# Altium PCB SBM_BMS.PcbDoc (part 2 of 4)
Units mil, origin at the board's own origin, x right, y up, seen from the top; angles counter-clockwise.
Board outline 7537.59 x 2875 mil, 2 copper layers (Top Layer, Bottom Layer), stack 64.961 mil thick; 180 components, 137 nets, 631 pads, 494 vias.
Unrouted connection lines stored in the file: 10.
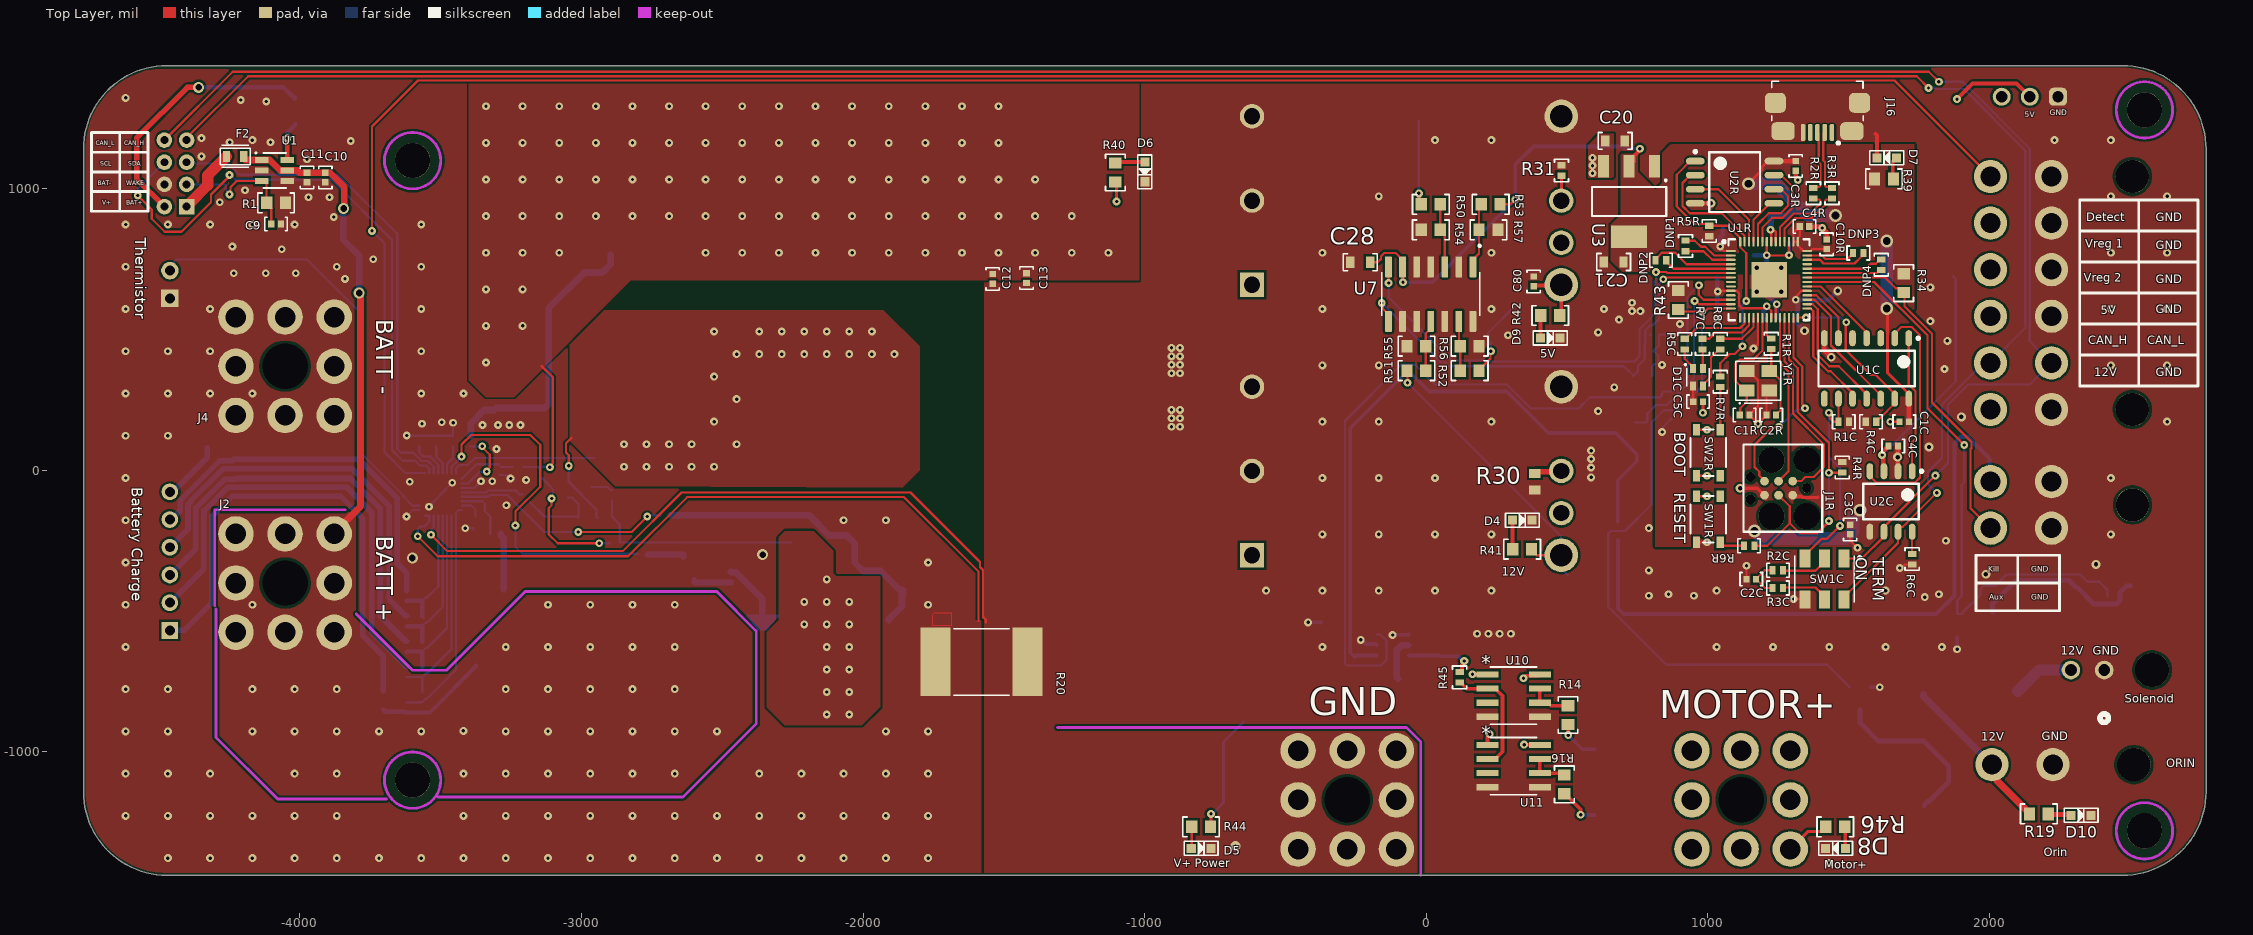
[diagram p0: Top Layer view]

## Part data (continued)
U1: library part MAX4520EUT+T, "Analog Switch SPST Normally Open", On resistance=160Ohm, Package="SOT-23-6 Analog Devices", Supplier Part Number 1=MAX4520EUT+TCT-ND, Voltage=9-36V, Circuit=SPST, ComponentLink1Description=Datasheet, ComponentLink1URL=https://www.analog.com/media/en/technical-documentation/data-sheets/max4510-max4520.pdf, Created By="Flip B", MF="Analog Devices", Supplier 1=Digi-Key
U1C: "CANbus Controller CAN 2.0 SPI Interface 14-SOIC", Made By="Robert Pafford", Max FD Rate="8 Mbps"
U1R: "Raspberry Pi RP2040", Crystal Frequency="12 MHz", Input Voltage=3.3V, Available Busses="SPI, I2C, PWM, USB", ComponentLink1Description=DigiKey, ComponentLink2Description=Datasheet, ComponentLink2URL=https://datasheets.raspberrypi.org/rp2040/rp2040-datasheet.pdf, Made By="Robert Pafford", Number of GPIOs=29
U2: library part BQ40Z80RSMT, "Multifuntion Li-ion/ Lipo Battery Pack Managment IC", Manufacturer="Texas Instruments", Quiescent Current=50mA, Supplier Part Number 1=296-BQ40Z80RSMTCT-ND, Supply Voltage="2.2V - 32V", ComponentLink1Description=Datasheet, ComponentLink1URL=https://www.ti.com/lit/ds/symlink/bq40z80.pdf?HQS=dis-dk-null-digikeymode-dsf-pf-null-wwe&ts=1672534896638&ref_url=https%253A%252F%252Fwww.ti.com%252Fgeneral%252Fdocs%252Fsuppproductinfo.tsp%253FdistId%253D10%2526gotoUrl%253Dhttps%253A%252F%252Fwww.ti.com%252Flit%252Fgpn%252Fbq40z80, Created By="Flip B", No. Of Cells=2S-6S, PartNumber=BQ40Z80RSMT, Supplier 1=Digi-Key
U2C: library part TJA1442AT, "CAN Interface IC High-Speed CAN Transceiver with Standby Mode", Supplier Part Number 1=771-TJA1442AT/0Z, Made By="Robert Pafford", Max Data Rate=5Mbps, Supplier 1=Mouser
U2R: "IC FLASH 128MBIT SPI/QUAD 8SOIC", Supplier Part Number 1=W25Q128JVSIQ-ND, Made By="Robert Pafford", Size=128M, Supplier 1=Digi-Key
U3: "800-mA 15-V linear voltage regulator 4-SOT-223 -40 to 125", Package="SOT-223-4 Texas Instruments", Arrow_Electronics-Purchase-URL=https://snapeda.com/shop?store=Arrow+Electronics&id=410186, Availability=Good, DigiKey-Purchase-URL=https://snapeda.com/shop?store=DigiKey&id=410186, MF="Texas Instruments", Mouser-Purchase-URL=https://snapeda.com/shop?store=Mouser&id=410186, MP=LM1117IMPX-3.3/NOPB, Price=None, SnapEDA_Link=https://www.snapeda.com/parts/LM1117IMPX-3.3/NOPB/Texas%20Instruments/view-part/410186/?ref=snap, Texas_Instruments-Purchase-URL=https://snapeda.com/shop?store=Texas+Instruments&id=410186
U4: library part SHT41-AD1B-R2, "Digital Relative Humidity Temperature Sensor, Â±1.8 / max 2.5 %RH, Â±0.2 Â°C, Ultra-Low-Power", Package=None, Supplier Part Number 1=1649-SHT41-AD1B-R2CT-ND, Availability="In Stock", Check_prices=https://www.snapeda.com/parts/SHT41-AD1B-R2/Sensirion/view-part/?ref=eda, MF=Sensirion, MP=SHT41-AD1B-R2, Price=None, Purchase-URL=https://pricing.snapeda.com/search/part/SHT41-AD1B-R2/?ref=eda, SnapEDA_Link=https://www.snapeda.com/parts/SHT41-AD1B-R2/Sensirion/view-part/?ref=snap, Supplier 1=Digi-Key
U5: "Diode Array 1 Pair Common Cathode 45 V Surface Mount TO-263-3, D²Pak (2 Leads + Tab), TO-263AB", Mfr_Name=Vishay, ComponentLink1Description="Supplier Link", ComponentLink1URL=https://www.digikey.com/en/products/detail/smc-diode-solutions/MBRB2545CT/6022901, Copyright="Copyright (C) 2023 Ultra Librarian. All rights reserved.", Manufacturer_Part_Number=MBRB2545CT, RefDes=RefDes, Type=DEV
U7: "16 Bit Analog to Digital Converter 4 Input 1 Sigma-Delta 14-SOIC", Package="SOIC-14 Microchip", Supplier Part Number 1=MCP3428-E/SL-ND, Availability=Unavailable, MF=Microchip, MP=MCP3428-E/SL, Price=None, SnapEDA_Link=https://www.snapeda.com/parts/MCP3428-E/SL/Microchip/view-part/13249/?ref=snap, Supplier 1=Digikey
U10 U11: "High-Side or Low-Side Gate Driver IC Non-Inverting 8-SOIC", Mfr_Name=Microchip, Supplier Part Number 1=TC4432EOA713CT-ND, Copyright="Copyright (C) 2024 Ultra Librarian. All rights reserved.", Manufacturer_Part_Number=TC4432EOA713, RefDes=RefDes, Supplier 1=Digikey, Type=DEV
U13: "IC SWITCH SPST-NOX1 25OHM 6TSOP", Mfr_Name=Vishay, Supplier Part Number 1=781-DG448DV-E3, Copyright="Copyright (C) 2024 Ultra Librarian. All rights reserved.", Manufacturer_Part_Number=DG448DV-T1-E3, RefDes=RefDes, Supplier 1=Mouser, Type=DEV
Y1R: library part CRYSTAL_12MHz_SMD_SMALL, "12 MHz ±20ppm Crystal 18pF 100 Ohms 4-SMD, No Lead (3.2x2.5mm)", Frequency="12 MHz", Load Capacitance=18pF, Supplier Part Number 1=2151-RH100-12.000-18-2030-EXT-TRCT-ND, ESR="100 Ohms", Made By="Robert Pafford", Supplier 1=Digi-Key

## Free pads (board coordinates)
  round 125 hole 125 unplated: 10(-3600,-1100) 10(-3600,1100) 10(2550,-1280) 10(2550,1280)

## Via types
v1: diameter 28, hole 12, Top Layer to Bottom Layer, tented both sides, 377 vias
v2: diameter 27.56, hole 11.81, Top Layer to Bottom Layer, tented both sides, 89 vias
v3: diameter 31.5, hole 15.75, Top Layer to Bottom Layer, tented both sides, 14 vias
v4: diameter 45.28, hole 27.56, Top Layer to Bottom Layer, tented both sides, 6 vias
v5: diameter 39.37, hole 23.62, Top Layer to Bottom Layer, tented both sides, 5 vias
v6: diameter 36, hole 12, Top Layer to Bottom Layer, tented both sides, 1 vias
v7: diameter 28, hole 12, Top Layer to Bottom Layer, 1 vias
v8: diameter 30, hole 12, Top Layer to Bottom Layer, tented both sides, 1 vias

## Nets (pads, with @x,y where several pads share a name; then routed paths per layer and width w, separated by ;. In a path a pad name is that pad's centre, name@x,y a point inside that pad or via, vN(x,y) a via of type N, cw(c..) or ccw(c..) an arc to the next point about the centre after c; other vN are vias at no path point)
1v1_RP2040: C11R.1 C12R.1 C13R.1 U1R.23 U1R.45 U1R.50 | length 566.9
  Top Layer w7.87: U1R.50@1208.94,812.3 v2(1208.94,763.58) v2(1287.68,763.58) U1R.45@1287.68,812.3 ; U1R.23@1240.43,541.63 1240.43,577.15 1248.31,585.03 v2@1248.31,590.35
  Bottom Layer w15.75: C13R.1@1163.07,763.58 v2(1208.94,763.58) 1208.94,625.68 v2(1244.27,590.35) 1244.27,548.53 1248.31,544.49 1248.31,543.7 1255.39,536.61 C12R.1@1256.18,536.61 ; v2(1287.68,763.58) C11R.1@1287.68,809.45
3V3_MEAS: R53.2 R57.1 U7.1 | length 234.5
  Top Layer w7.87: U7.1@165.35,722.64 165.35,748.23 186.97,769.85 R57.1@186.97,854.33 186.97,937.01 R53.2@194.85,944.88
3V3_RP2CAN: C1C.1 C3C.1 C3R.1 C4R.1 C5C.1 C5R.1 C6R.1 C7R.1 C8R.1 C9R.1 C10R.1 C21.1 C27.1 C28.1 D1C.4 J1R.2 R1C.1 R4C.1 R4R.1 R5R.1 R32.1 R33.1 R34.1 R35.1 R39.1 R43.1 R53.1 U1C.14 U1R.1 U1R.10 U1R.22 U1R.33 U1R.42 U1R.43 U1R.44 U1R.48 U1R.49 U2C.5 U2R.8 U3.2 U3.4 U4.3 U7.6 | length 5135.7
  Top Layer w7.87: C28.1@-200,739 -173.19,739 -161.4,750.78 -161.4,760.07 -149.62,771.85 -108.27,771.85 -84.65,748.23 U7.6@-84.65,722.64 -83.82,721.82 -83.82,668.82 v1(-83,668) ; R53.1@261.85,944.88 298.88,944.88 v1(316,962) ; U3.2@720,1080 U3.2@735.75,1095.75 ; v2@1035.71,637.6 U1R.10@1081.48,637.6 1101.29,637.6 1110.51,628.37 1110.51,612.13 1110.51,586.42 1120.99,575.94 1197.07,575.94 1203.61,582.48 v2(1208.94,582.48) 1224.69,566.73 U1R.22@1224.69,541.63 ; v2(1043.58,795.08) 1043.58,792.19 1056.44,779.33 U1R.1@1081.48,779.33 ; U1R.49@1224.69,812.3 1224.69,851.32 1220,856 1225.57,850.43 1237.86,850.43 1240.43,847.86 U1R.48@1240.43,812.3 ; v2(1311.3,606.1) 1315.07,609.87 1315.07,620.33 1332.34,637.6 U1R.33@1352.15,637.6 ; U1R.43@1319.17,799.02 1338.86,779.33 U1R.42@1352.15,779.33 1365.43,779.33 1365.43,781.21 1370.05,785.83 C10R.1@1421.54,785.83 ; C4R.1@1325.67,865.94 C4R.1@1325.67,865.16 ; C1C.1@1713.76,173.52 C1C.1@1714.25,173.03 ; C4R.1@1325.67,865.16 1318.58,858.07 1317.8,858.07 1303.43,843.7 U1R.44@1303.43,812.3 U1R.43@1319.17,812.3 1319.17,825.59 1325.67,832.09 C4R.1@1325.67,865.16
  Top Layer w9.84: C5C.1@945.01,243.9 947.42,246.31 947.42,298.72 D1C.4@947.13,299.02 ; v4(1143.71,1018.29) 1191.69,1066.27 1191.69,1077.3 1212.82,1098.43 U2R.8@1234.47,1098.43 ; v4(1635,575) 1637.87,572.13 1637.87,346.85 1713.76,270.96 U1C.14@1713.76,254.23
  Top Layer w10: C5C.1@945.01,243.9 C5C.1@947.14,243.9
  Top Layer w11.81: J1R.2@1300.67,-88.19 1304.34,-91.86 1332.1,-91.86 1336.83,-96.59 1388.13,-96.59 1390.04,-94.69
  Top Layer w13: U3.2@735.75,1095.75 737.05,1097.05 737.05,1116.69 758.3,1137.94 v1(758.3,1142)
  Top Layer w15.75: U2R.8@1234.47,1098.43 C3R.1@1311.3,1098.43 ; C1C.1@1713.76,173.52 U1C.14@1713.76,254.23
  Bottom Layer w7.87: R33.1@802,335 802,369.31 810.37,377.68 833.47,377.68 v7(836.63,374.52) ; v7@827.32,377.68 823.56,381.44 823.56,406.94 R32.1@807.5,423 807.5,425.5 826.5,444.5 U4.3@826.5,482.88 893.12,482.88 C27.1@895,481 900,486 v1(900,520) ; v1(837.39,136.46) 841.24,140.31 841.24,155.24 867.5,181.5 R35.1@870,181.5
  Bottom Layer w13: v1(-83,668) 22,668 v1(316,962) 316,1086 380,1150 693,1150 701,1142 v1(758.3,1142)
  Bottom Layer w15.75: v2(1032,537) 1033.56,538.56 1033.56,632.85 v2@1035.71,635 ; C6R.1@1032.13,685 1033.62,683.5 1033.62,636.5 v2(1035.12,635) ; v2(1043.58,795.08) 1043.58,827.42 1052.13,835.96 C7R.1@1052.13,860 ; C8R.1@1197.02,536.61 1197.02,565.24 1208.94,577.15 v2(1208.94,582.48) ; v2(1311.3,606.1) 1319.17,598.23 1319.17,555.73 1318.78,555.34 1318.78,519.88 v3(1342.8,495.87) ; v2@1319.17,605.41 1353.92,605.41 C9R.1@1354.61,604.72 1428.03,604.72 v3(1460.91,637.6)
  Bottom Layer w23.62: v2(1221.8,854.2) 1222.55,854.95 1222.55,901.8 C5R.1@1224.69,903.94 1278.43,903.94 1317.3,942.82
  Bottom Layer w45.28: v4(1143.71,1018.29) 1241.83,1018.29 1317.3,942.82 1354.8,905.32 v4(1453.03,905.32) ; v4(1165,-215) 1165.56,-215 1192.89,-242.33 1488.89,-242.33 1515.83,-215.39 1515.83,-165.75 v4(1539.65,-141.93) ; v4(1635,575) v4(1635,815)
5V: C4C.1 C20.1 C25.1 C80.1 J1.9 J8.2 PS2.7 PS2.8 R42.1 R52.1 U2C.3 U3.3 | length 1653.6
  Top Layer w7.87: R52.1@187.04,354.33 187.04,356.83 227.4,397.19 227.4,421.48 v1(228.92,423)
  Top Layer w13: C80.1@381,653.87 383.47,656.35 476.74,656.35 PS2.8@479.21,658.82 479.21,555.71 R42.1@473.5,550
  Top Layer w14: v1(1884.23,1318.44) 1939.55,1373.76 2096.24,1373.76 J8.2@2143,1327
  Top Layer w15.75: U2C.3@1624.88,-3.15 1621.87,-0.14 1621.87,51.44 v2(1618.39,54.92) 1622.15,58.69 1622.15,67.15 1640.63,85.63 C4C.1@1640.63,86.42
  Bottom Layer w7.87: v1(228.92,423) 228.92,454.25 220,463.17 220,488.98 316.4,585.38 ; v2(1618.39,54.92) 1880,316.54 1880,680 1870,690
  other v1: 590,1055 590.1,1082.34 590,1110
5V_MEAS: R52.2 R56.1 U7.13 | length 176.9
  Top Layer w7.87: U7.13@115.35,529.33 115.35,445.63 R56.1@120.04,440.94 R52.2@120.04,354.33
12V: C23.1 C81.1 J1.7 PS1.7 PS1.8 Q4.2 Q10.2 R17.1 R37.1 R41.1 R51.1 | length 1065.3
  Top Layer w7.87: R51.1@-68.93,354.33 -66.93,352.33 v1(-66.93,311.02) ; R41.1@373.5,-280 373.5,-282.5 392.18,-301.18 PS1.8@479.21,-301.18
  Bottom Layer w7.87: v1(-66.93,311.02) 478.43,-234.34 478.43,-300.4 PS1.8@479.21,-301.18 ; PS1.8@455.61,-324.78 502.83,-372
12V_MEAS: R51.2 R55.1 U7.11 | length 182.2
  Top Layer w7.87: R51.2@-1.93,354.33 R55.1@-1.93,440.94 -1.93,486.45 15.35,503.74 U7.11@15.35,529.33
AUX_SWITCH: J5.3 R34.2 U1R.36 | length 1333.7
  Top Layer w7.87: U1R.36@1352.15,684.84 1628.72,684.84 1666.8,646.76 1679.74,646.76 R34.2@1695,631.5 1697.5,631.5 1697.5,583.49 1795.75,485.24 1795.75,240.75 1935.81,100.69 1935.81,79.31 1932.6,76.1 1932.6,-134.49 J5.3@2003.46,-205.35
BAT+: F2.2 J10.1 | length 237
  Top Layer w39.37: J10.1@-4402.68,936.89 -4394.86,944.7 -4394.86,945.41 -4327.69,1012.58 -4327.69,1047.82 F2.2@-4260.51,1115